# Altium PCB LXDbig.PcbDoc
Units mil, origin at the board's own origin, x right, y up, seen from the top; angles counter-clockwise.
Board outline 10551.18 x 9448.82 mil, 2 copper layers (Top Layer, Bottom Layer); 93 components, 61 nets, 369 pads, 10 vias.
Unrouted connection lines stored in the file: 93.
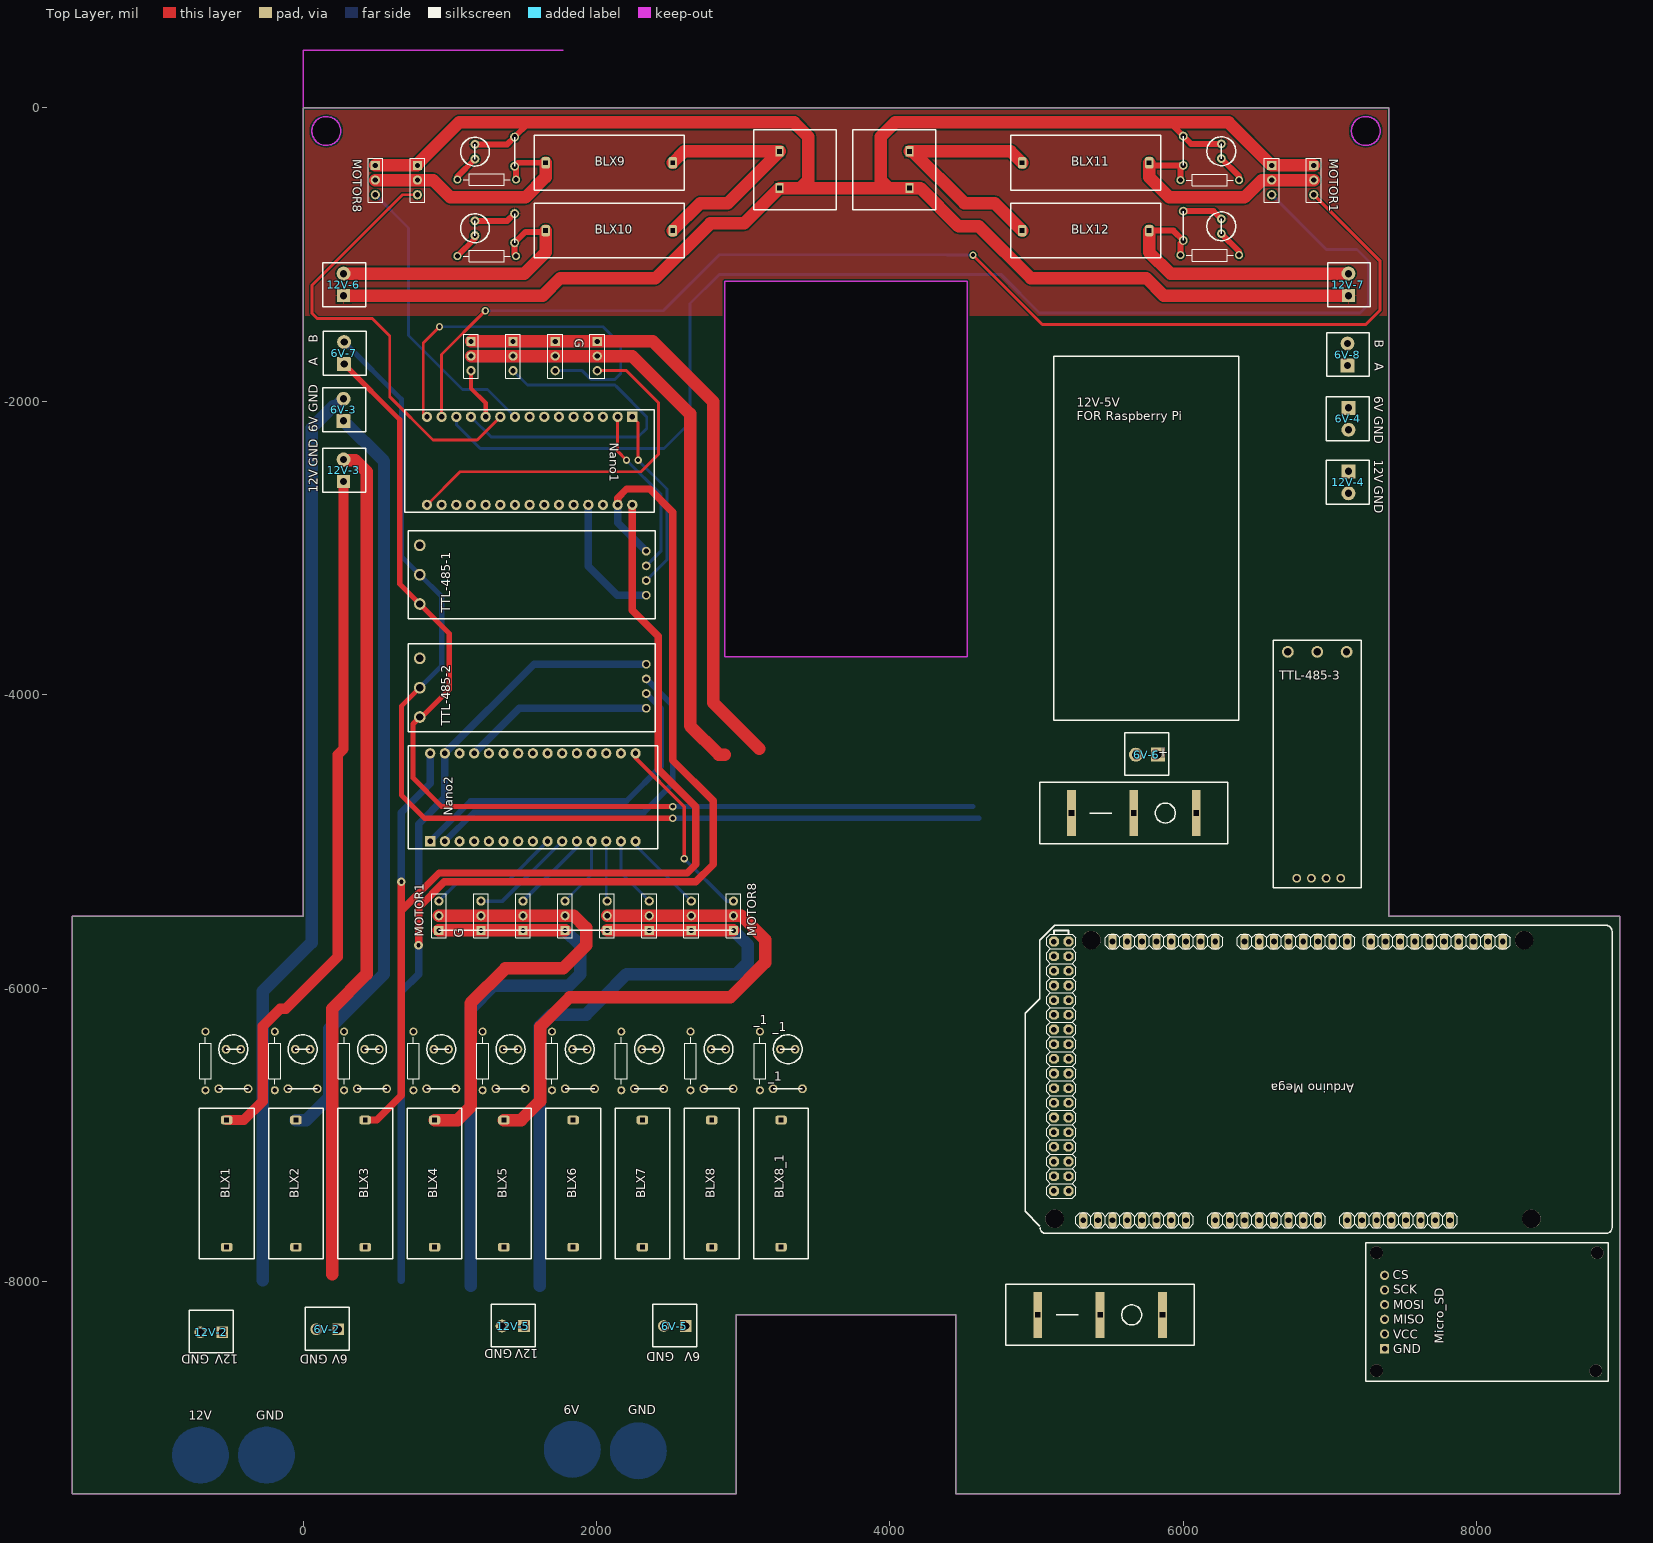
[diagram p0: Top Layer view]
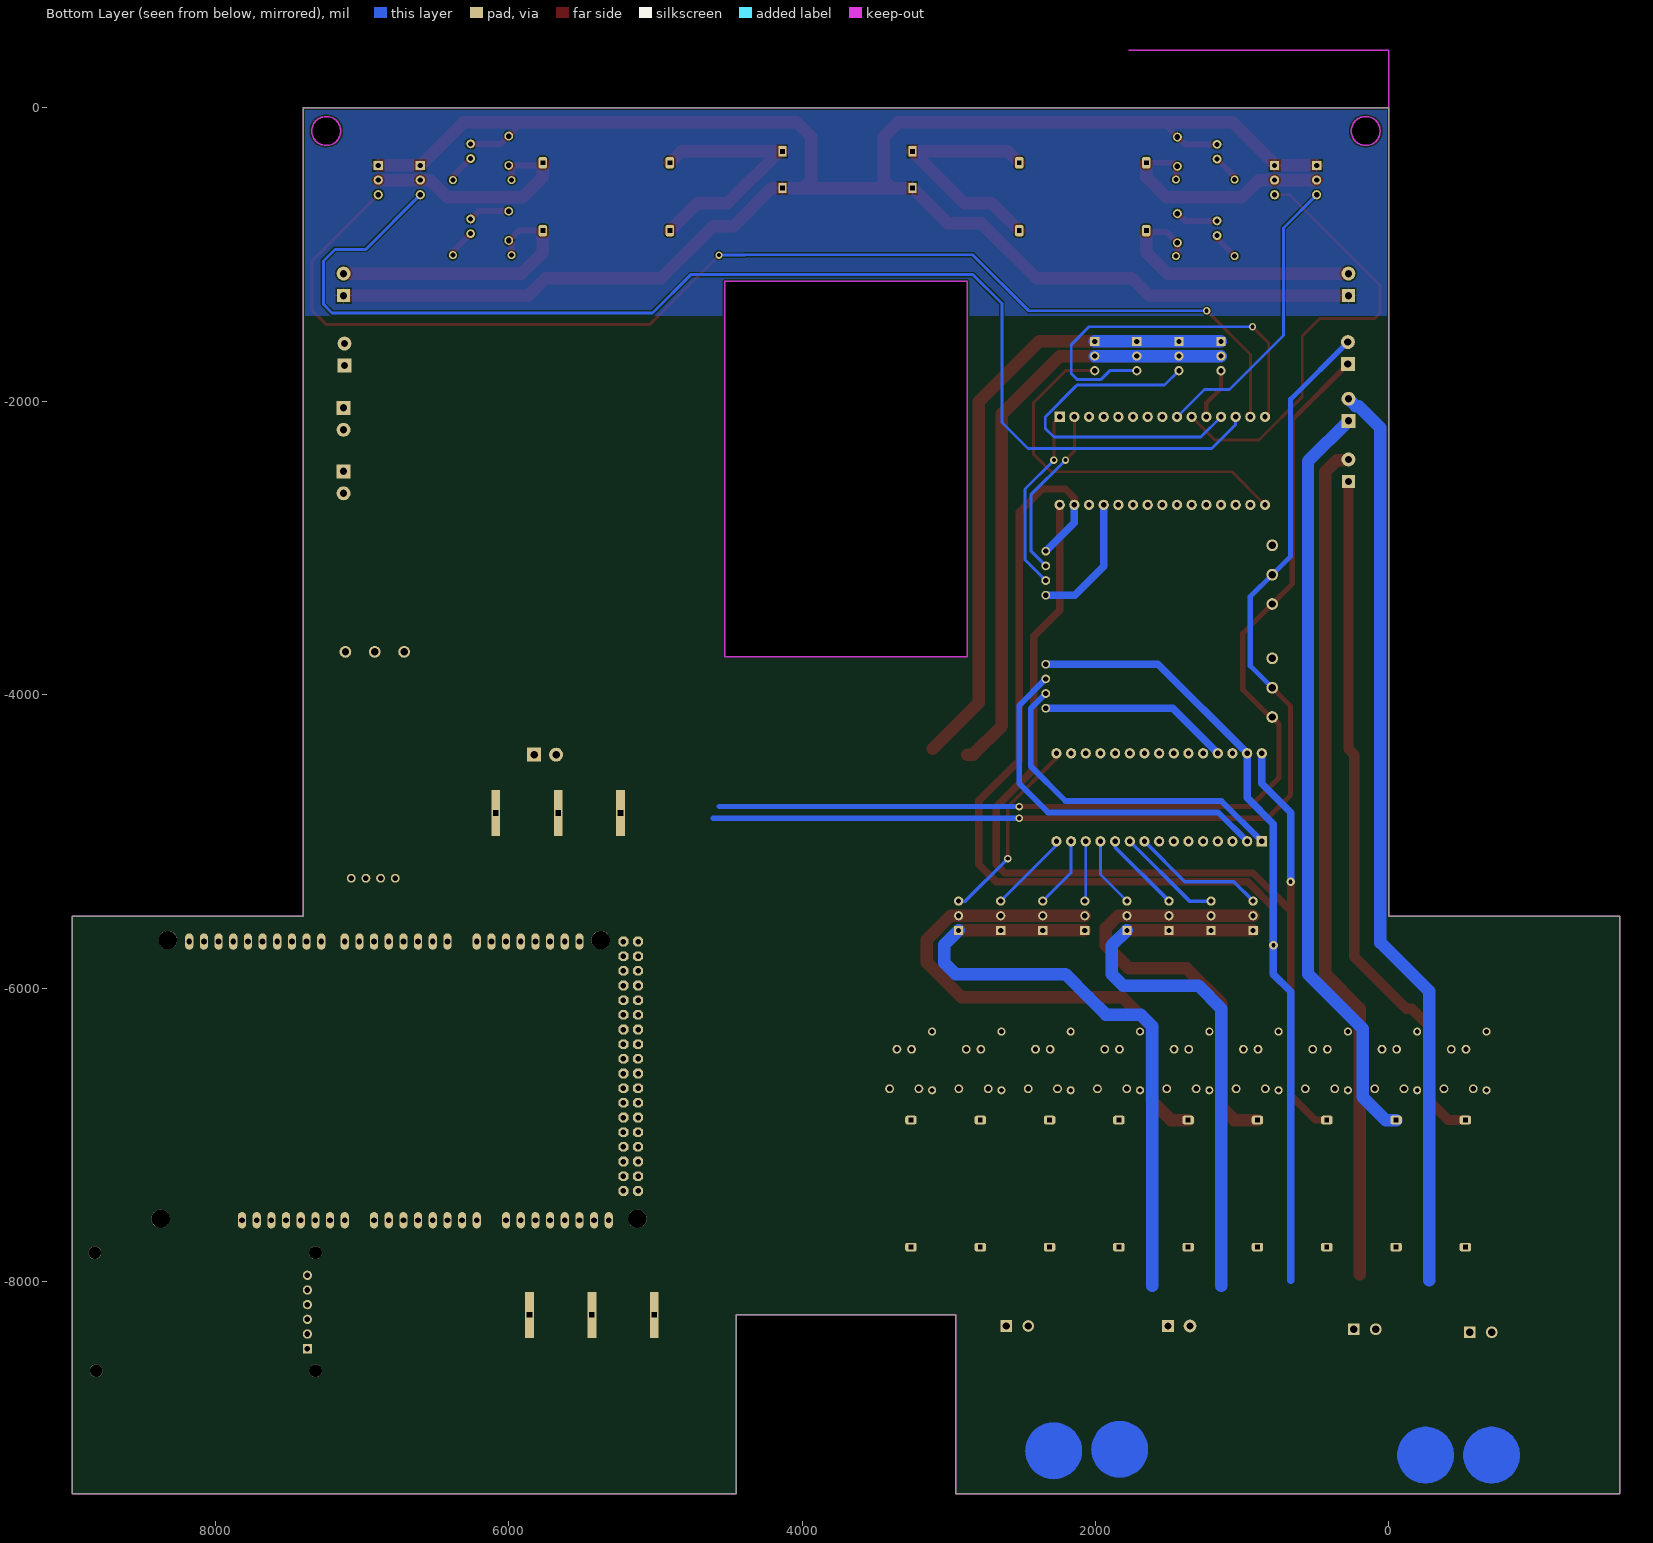
[diagram p1: Bottom Layer view, seen from below]

## Layer stack, top to bottom
Top Solder: solder mask 0.4, Solder Resist, Dk 3.5
Top Layer: signal copper 1.4
Dielectric 1: dielectric 12.6, FR-4, Dk 4.8
Bottom Layer: signal copper 1.4
Bottom Solder: solder mask 0.4, Solder Resist, Dk 3.5

## Board outline
-1574.8,-9448.82 -1574.8,-5511.81 0,-5511.81 0,0 7401.57,0 7401.57,-5511.81 8976.38,-5511.81 8976.38,-9448.82 4448.82,-9448.82 4448.82,-8228.35 2952.76,-8228.35 2952.76,-9448.82
cut-out: 157.48,-255.91 cw(c157.48,-157.48) 59.06,-157.48 cw(c157.48,-157.48) 157.48,-59.06 cw(c157.48,-157.48) 255.91,-157.48 cw(c157.48,-157.48)
cut-out: 7145.67,-157.48 ccw(c7244.09,-157.48) 7244.09,-255.91 ccw(c7244.09,-157.48) 7342.52,-157.48 ccw(c7244.09,-157.48) 7244.09,-59.06 ccw(c7244.09,-157.48)
cut-out: 2874.02,-3740.16 4527.56,-3740.16 4527.56,-1181.1 2874.02,-1181.1

## Design rules (kind name [scope] priority, off if disabled: settings)
Clearance [All] p1: gap=10
HoleSize [All] p1 off: absolutevalues=TRUE maxlimit=150 minlimit=1 maxpercent=80.000 minpercent=20.000
PolygonConnect [All] p1: connectstyle=Relief reliefconductorwidth=10 reliefentries=4 polygonreliefangle="90 Angle" airgapwidth=10
RoutingVias [All] p1: holewidth=28 width=50 viastyle="Through Hole" minholewidth=28 minwidth=50 maxholewidth=28 maxwidth=50
SilkToSilkClearance [All] p1 off: silktosilkclearance=10
SilkToSolderMaskClearance [IsPad] p1 off: minsilkscreentomaskgap=10 clearancetoexposedcopper=TRUE
SolderMaskExpansion [All] p1: expansion=4
Width [All] p1: maxlimit=150 minlimit=20 preferedwidth=20
27 further rules are at their usual default settings.

## Components (designator, comment, footprint, x,y, rotation, side; value= is the part's Value field where it differs from the comment)
6V-2 "Comment" "HEADER 1X2a"#1 239.49,-8326.42 r180 top
6V-3 "Comment" "HEADER 1X2a"#2 275.59,-2133.03 r90 top
6V-4 "Comment" "HEADER 1X2a"#2 7125.98,-2044.45 r270 top
6V-5 "Comment" "HEADER 1X2a"#1 2608.27,-8304.29 r180 top
6V-6 "Comment" "HEADER 1X2a"#2 5826.77,-4409.45 r180 top
6V-7 "Comment" "HEADER 1X2a"#2 279.13,-1746.42 r90 top
6V-8 "Comment" "HEADER 1X2a"#2 7119.68,-1756.26 r90 top
12V-2 "Comment" "HEADER 1X2a"#1 -551.18,-8346.46 r180 top
12V-3 "Comment" "HEADER 1X2a"#3 275.59,-2546.42 r90 top
12V-4 "Comment" "HEADER 1X2a"#2 7125.98,-2477.52 r270 top
12V-5 "Comment" "HEADER 1X2a"#4 1505.91,-8304.29 r180 top
12V-6 "Comment" "HEADER 1X2a"#3 275.59,-1279.53 r90 top
12V-7 "Comment" "HEADER 1X2a"#3 7125.98,-1279.53 r90 top
_1 "Comment" LED_BLUE 3303.78,-6417.2 r0 top
_1 "Comment" C_50V_10u 3203.78,-6687.2 r0 top
_1 "Comment" AXIAL-0.4 3113.78,-6497.2 r90 top
"Arduino Mega" "Comment" arduino_pin 6988.19,-6358.27 r180 top
BLX1 "Comment" BLX-A -521.65,-7766.26 r90 top
BLX2 "Comment" BLX-A -49.21,-7766.26 r90 top
BLX3 "Comment" BLX-A 423.23,-7766.26 r90 top
BLX4 "Comment" BLX-A 895.67,-7766.26 r90 top
BLX5 "Comment" BLX-A 1368.11,-7766.26 r90 top
BLX6 "Comment" BLX-A 1840.55,-7766.26 r90 top
BLX7 "Comment" BLX-A 2312.99,-7766.26 r90 top
BLX8 "Comment" BLX-A 2785.43,-7766.26 r90 top
BLX8_1 "Comment" BLX-A 3257.87,-7766.26 r90 top
BLX9 "Comment" BLX-A 1653.54,-374.02 r0 top
BLX10 "Comment" BLX-A 1653.54,-836.61 r0 top
BLX11 "Comment" BLX-A 4901.57,-374.02 r0 top
BLX12 "Comment" BLX-A 4901.57,-836.61 r0 top
Micro_SD "Comment" Micro_SD 9842.52,-10334.65 r0 top
MOTOR1 "Comment" HDR1X3 6889.76,-392.12 r270 top
MOTOR1 "Comment" HDR1X3 925.2,-5607.44 r90 top
MOTOR8 "Comment" HDR1X3 492.13,-392.12 r270 top
MOTOR8 "Comment" HDR1X3 2933.07,-5607.44 r90 top
Nano1 "Comment" NANO 2244.09,-2106.3 r270 top
Nano2 "Comment" NANO 866.14,-5000 r90 top
TTL-485-1 "Comment" ttl-485#1 2401.57,-3481.46 r180 top
TTL-485-2 "Comment" ttl-485#1 2401.57,-4251.97 r180 top
TTL-485-3 "Comment" ttl-485#2 6614.17,-5314.96 r90 top
? "Comment" LED_BLUE 1171.14,-820.24 r90 top
? "Comment" C_50V_10u 1441.14,-920.24 r90 top
? "Comment" AXIAL-0.4 1251.14,-1010.24 r180 top
? "Comment" LED_BLUE 1171.14,-298.58 r90 top
? "Comment" C_50V_10u 1441.14,-398.58 r90 top
? "Comment" AXIAL-0.4 1251.14,-488.58 r180 top
? "Comment" switch 5433.07,-8228.35 r0 top
? "Comment" "5V REGULATOR" 5118.11,-4173.23 r0 top
? "Comment" 6.35duan 3070.87,-147.64 r270 top
? "Comment" 6.35duan 4311.02,-694.88 r90 top
? "Comment" switch 5662.99,-4807.44 r0 top
? "Comment" AXIAL-0.4 2641.34,-6497.2 r90 top
? "Comment" C_50V_10u 2731.34,-6687.2 r0 top
? "Comment" LED_BLUE 2831.34,-6417.2 r0 top
? "Comment" AXIAL-0.4 2168.9,-6497.2 r90 top
? "Comment" C_50V_10u 2258.9,-6687.2 r0 top
? "Comment" LED_BLUE 2358.9,-6417.2 r0 top
? "Comment" AXIAL-0.4 1696.46,-6497.2 r90 top
? "Comment" C_50V_10u 1786.46,-6687.2 r0 top
? "Comment" LED_BLUE 1886.46,-6417.2 r0 top
? "Comment" AXIAL-0.4 1224.02,-6497.2 r90 top
? "Comment" C_50V_10u 1314.02,-6687.2 r0 top
? "Comment" LED_BLUE 1414.02,-6417.2 r0 top
? "Comment" AXIAL-0.4 751.57,-6497.2 r90 top
? "Comment" C_50V_10u 841.57,-6687.2 r0 top
? "Comment" LED_BLUE 941.57,-6417.2 r0 top
? "Comment" AXIAL-0.4 279.13,-6497.2 r90 top
? "Comment" C_50V_10u 369.13,-6687.2 r0 top
? "Comment" LED_BLUE 469.13,-6417.2 r0 top
? "Comment" AXIAL-0.4 -665.75,-6497.2 r90 top
? "Comment" C_50V_10u -575.75,-6687.2 r0 top
? "Comment" LED_BLUE -475.75,-6417.2 r0 top
? "Comment" AXIAL-0.4 -193.31,-6497.2 r90 top
? "Comment" C_50V_10u -103.31,-6687.2 r0 top
? "Comment" LED_BLUE -3.31,-6417.2 r0 top
? "Comment" HDR1X3 6602.92,-392.12 r270 top
? "Comment" HDR1X3 2005.06,-1591.69 r270 top
? "Comment" HDR1X3 1718.22,-1591.69 r270 top
? "Comment" HDR1X3 1431.38,-1591.69 r270 top
? "Comment" HDR1X3 1144.54,-1591.69 r270 top
? "Comment" HDR1X3 778.97,-392.12 r270 top
? "Comment" HDR1X3 2646.23,-5607.44 r90 top
? "Comment" HDR1X3 2359.39,-5607.44 r90 top
? "Comment" HDR1X3 2072.55,-5607.44 r90 top
? "Comment" HDR1X3 1785.71,-5607.44 r90 top
? "Comment" HDR1X3 1498.88,-5607.44 r90 top
? "Comment" HDR1X3 1212.04,-5607.44 r90 top
? "Comment" AXIAL-0.4 6181.1,-492.13 r0 top
? "Comment" C_50V_10u 5999.8,-191.97 r270 top
? "Comment" LED_BLUE 6259.84,-295.28 r270 top
? "Comment" AXIAL-0.4 6181.1,-1003.94 r0 top
? "Comment" C_50V_10u 5999.8,-703.78 r270 top
? "Comment" LED_BLUE 6259.84,-807.09 r270 top

## Footprints (in the part's own frame and the unit in brackets; to place one, negate y for a bottom-side part, rotate by r counter-clockwise, add the part's x,y. Pads: shape width x height; smd on the part's side, far side on the other; paste and mask are expansions set on the pad)
"5V REGULATOR" [mil]
  silkscreen extent 0,0 1260,2480
6.35duan [mm]
  rect 1.8x1.4 hole 0.8 square: 1(3.775,4.5) 2(10.125,4.5)
  silkscreen extent 0,0 13.9,14.3
arduino_pin [mil]
  round 126 hole 126: 1(-1385,1215) 1(-1335,-685) 1(1615,-685) 1(1865,1215)
  oval 56x112 hole 39: 1(-1190,-675) 1(-830,1225) 1(70,1225) 1(570,-675) 1(970,1225) 1(1470,-675) 2(-1090,-675) 2(-730,1225) 2(170,1225) 2(470,-675) 2(1070,1225) 2(1370,-675) 3(-990,-675) 3(-630,1225) 3(270,1225) 3(370,-675) 3(1170,1225) 3(1270,-675) 4(-890,-675) 4(-530,1225) 4(270,-675) 4(370,1225) 4(1170,-675) 4(1270,1225) 5(-790,-675) 5(-430,1225) 5(170,-675) 5(470,1225) 5(1070,-675) 5(1370,1225) 6(-690,-675) 6(-330,1225) 6(70,-675) 6(570,1225) 6(970,-675) 6(1470,1225) 7(-590,-675) 7(-230,1225) 7(-30,-675) 7(670,1225) 7(870,-675) 7(1570,1225) 8(-490,-675) 8(-130,1225) 8(-130,-675) 8(770,1225) 8(770,-675) 8(1670,1225) 9(-390,-675) 10(-290,-675)
  oct 66x66 hole 38: 1(1770,-675) 2(1870,-675) 3(1770,-575) 4(1870,-575) 5(1770,-475) 6(1870,-475) 7(1770,-375) 8(1870,-375) 9(1770,-275) 10(1870,-275) 11(1770,-175) 12(1870,-175) 13(1770,-75) 14(1870,-75) 15(1770,25) 16(1870,25) 17(1770,125) 18(1870,125) 19(1770,225) 20(1870,225) 21(1770,325) 22(1870,325) 23(1770,425) 24(1870,425) 25(1770,525) 26(1870,525) 27(1770,625) 28(1870,625) 29(1770,725) 30(1870,725) 31(1770,825) 32(1870,825) 33(1770,925) 34(1870,925) 35(1770,1025) 36(1870,1025)
  silkscreen extent -1935,-785 2065,1315
AXIAL-0.4 [mm] "Axial Device, Thru-Hole; 2 Leads; 0.4 in Pin Spacing"
  round 1.4 hole 0.85: 1(-5.08,0) 2(5.08,0)
  silkscreen extent -4.06,-1.02 4.06,1.02
BLX-A [mm]
  rrect50% 1.5x2 hole 0.762 square: 1(0,0) 2(22,0)
  silkscreen extent -2,-4.74 24,4.74
C_50V_10u [mil]
  round 60 hole 38: 1(0,0) 2(200,0)
  silkscreen extent 0,0 200,0
HDR1X3 [mm] "Connector; Header; 3 Position"
  rect 1.6x1.6 hole 0.9: 1(0,0)
  round 1.6 hole 0.9: 2(2.54,0) 3(5.08,0)
  silkscreen extent -1.27,-1.27 6.35,1.27
"HEADER 1X2a"#1 [mil]
  rect 80x80 hole 50: 1(0,0)
  round 80 hole 50: 2(150,0)
  silkscreen extent -75,-150 225,142
"HEADER 1X2a"#2 [mil]
  rect 95x95 hole 50 paste+0: 1(0,0)
  round 95 hole 50: 2(150,0)
  silkscreen extent -75,-150 225,142
"HEADER 1X2a"#3 [mil]
  rect 90x90 hole 50: 1(0,0)
  round 95 hole 50: 2(150,0)
  silkscreen extent -75,-150 225,142
"HEADER 1X2a"#4 [mil]
  rect 80x80 hole 50: 1(0,0)
  round 86.61 hole 50: 2(150,0)
  silkscreen extent -75,-150 225,142
LED_BLUE [mil]
  round 60 hole 35: 1(-50,0) 2(50,0)
  silkscreen extent -98,-98 98,98
Micro_SD [mm]
  rect 1.6x1.6 hole 0.965: 1(-62.738,47.65)
  round 1.6 hole 0.965: 2(-62.738,50.19) 3(-62.738,52.73) 4(-62.738,55.27) 5(-62.738,57.81) 6(-62.738,60.35)
  round 2.2 hole 2.2: 6(-64.135,43.815) 6(-64.135,64.262) 6(-26.162,43.815) 6(-25.908,64.262)
  silkscreen extent -66,42 -24,66
NANO [mil]
  rect 70x70 hole 36: 1(0,0)
  round 70 hole 36: 2(0,-100) 3(0,-200) 4(0,-300) 5(0,-400) 6(0,-500) 7(0,-600) 8(0,-700) 9(0,-800) 10(0,-900) 11(0,-1000) 12(0,-1100) 13(0,-1200) 14(0,-1300) 15(0,-1400) 16(600,-1400) 17(600,-1300) 18(600,-1200) 19(600,-1100) 20(600,-1000) 21(600,-900) 22(600,-800) 23(600,-700) 24(600,-600) 25(600,-500) 26(600,-400) 27(600,-300) 28(600,-200) 29(600,-100) 30(600,0)
  silkscreen extent -50,-1550 650,150
switch [mm]
  rect 1.524x8 hole 0.9 square: 1(-10.8,0) 2(0,0) 3(10.8,0)
  silkscreen extent -16.3,-5.3 16.3,5.3
ttl-485#1 [mil]
  round 80 hole 50: 1(1606.3,-99.21) 2(1606.3,-299.21) 3(1606.3,-499.21)
  round 60 hole 35: 4(62.99,-159.45) 5(62.99,-259.45) 6(62.99,-359.45) 7(62.99,-459.45)
  silkscreen extent 0,-599 1685,0
ttl-485#2 [mil]
  round 80 hole 50: 1(1606.3,-99.21) 2(1606.3,-299.21) 3(1606.3,-499.21)
  round 60 hole 38: 4(62.99,-159.45) 5(62.99,-259.45) 6(62.99,-359.45) 7(62.99,-459.45)
  silkscreen extent 0,-599 1685,0

## Via types
v1: diameter 50, hole 28, Top Layer to Bottom Layer, 8 vias
v2: diameter 60, hole 28, Top Layer to Bottom Layer, 2 vias

## Nets (pads, with @x,y where several pads share a name; then routed paths per layer and width w, separated by ;. In a path a pad name is that pad's centre, name@x,y a point inside that pad or via, vN(x,y) a via of type N, cw(c..) or ccw(c..) an arc to the next point about the centre after c; other vN are vias at no path point)
3V3: 
6IN: 
6ING: 
7.5VL: ?.1@3248.03,-296.26 BLX9.2 BLX10.2 | length 1712.7
  Top Layer w85: BLX10.2 2705.71,-650.59 2893.7,-650.59 3248.03,-296.26 2597.44,-296.26 BLX9.2
7.5VLO: ?.1@1441.14,-398.58 ?.1@1451.14,-488.58 ?.2@778.97,-492.13 BLX9.1 MOTOR8.2@492.13,-492.13 | length 1682.6
  Top Layer w40: ?.1@1451.14,-488.58 1451.14,-408.58 1441.14,-398.58 1465.71,-374.02 BLX9.1
  Top Layer w85: MOTOR8.2@492.13,-492.13 778.97,-492.13 885.83,-492.13 1003.94,-610.24 1515.75,-610.24 1653.54,-472.44 BLX9.1
7.5VLO2: 12V-6.2 ?.1@1441.14,-920.24 ?.1@1451.14,-1010.24 BLX10.1 | length 1926.9
  Top Layer w40: ?.1@1451.14,-1010.24 1441.14,-1000.24 1441.14,-920.24 1514.92,-846.46 1643.7,-846.46 BLX10.1
  Top Layer w85: 12V-6.2 1508.27,-1129.53 1653.54,-984.25 BLX10.1
7.5VR: ?.2@4133.86,-296.26 BLX11.1 BLX12.1 | length 1770.8
  Top Layer w85: ?.2@4133.86,-296.26 ?.2@4154.53,-296.26 ; BLX12.1 4714.57,-649.61 4507.87,-649.61 ?.2@4154.53,-296.26 ; BLX11.1 4823.82,-296.26 ?.2@4154.53,-296.26
7.5VRO: ?.1@5981.1,-492.13 ?.2@5999.8,-391.97 ?.2@6602.92,-492.13 BLX11.2 MOTOR1.2@6889.76,-492.13 | length 1673.9
  Top Layer w40: BLX11.2 5785.67,-391.97 5999.8,-391.97 5981.1,-410.67 ?.1@5981.1,-492.13
  Top Layer w85: BLX11.2 5767.72,-472.44 5905.51,-610.24 6417.32,-610.24 6535.43,-492.13 6602.92,-492.13 MOTOR1.2@6889.76,-492.13
7.5VRO2: 12V-7.2 ?.1@5981.1,-1003.94 ?.2@5999.8,-903.78 BLX12.2 | length 1933.9
  Top Layer w40: BLX12.2 5932.64,-836.61 5999.8,-903.78 5981.1,-922.48 ?.1@5981.1,-1003.94
  Top Layer w85: BLX12.2 5767.72,-984.25 5912.99,-1129.53 12V-7.2
12IN: 
12ING: 
50: "Arduino Mega.31" Micro_SD.3
51: "Arduino Mega.32" Micro_SD.4
52: "Arduino Mega.33" Micro_SD.5
53: "Arduino Mega.34" Micro_SD.6@7372.52,-7958.66
GND: 6V-2.2 6V-3.2 6V-4.2 6V-5.2 6V-6.2 12V-2.2 12V-3.2 12V-4.2 12V-5.2 12V-6.1 12V-7.1 "Arduino Mega.6"@7318.19,-7583.27 "Arduino Mega.7"@7218.19,-7583.27 ?.1@778.97,-392.13 ?.1@1144.54,-1591.69 ?.1@1212.04,-5607.44 ?.1@1431.38,-1591.69 ?.1@1498.88,-5607.44 ?.1@1718.22,-1591.69 ?.1@1785.72,-5607.44 ?.1@2005.06,-1591.69 ?.1@2072.55,-5607.44 ?.1@2359.39,-5607.44 ?.1@2646.23,-5607.44 ?.1@4133.86,-546.26 ?.1@5999.8,-191.97 ?.1@5999.8,-703.78 ?.1@6259.84,-245.28 ?.1@6259.84,-757.09 ?.1@6602.92,-392.13 ?.2@46.69,-6417.21 ?.2@96.69,-6687.21 ?.2@519.13,-6417.21 ?.2@569.13,-6687.21 ?.2@991.58,-6417.21 ?.2@1041.58,-6687.21 ?.2@1171.14,-248.58 ?.2@1171.14,-770.24 ?.2@1441.14,-198.58 ?.2@1441.14,-720.24 ?.2@1464.02,-6417.21 ?.2@1514.02,-6687.21 ?.2@1936.46,-6417.21 ?.2@1986.46,-6687.21 ?.2@2408.9,-6417.21 ?.2@2458.9,-6687.21 ?.2@2881.34,-6417.21 ?.2@2931.34,-6687.21 ?.2@3248.03,-546.26 ?.2@-375.75,-6687.21 ?.2@-425.75,-6417.21 Micro_SD.1 MOTOR1.1 MOTOR8.1 Nano1.29 Nano2.29 TTL-485-1.7 TTL-485-2.7 TTL-485-3.7 | length 52617.3
  Top Layer w40: ?.2@1171.14,-770.24 1391.14,-770.24 ?.2@1441.14,-720.24 ; ?.2@1171.14,-248.58 1391.14,-248.58 1441.14,-198.58 1535.43,-104.29 ; 5905.51,-98.43 5906.26,-98.43 5999.8,-191.97 6053.11,-245.28 ?.1@6259.84,-245.28 ; ?.1@5999.8,-703.78 6206.53,-703.78 ?.1@6259.84,-757.09
  Top Layer w50: v2(787.4,-5708.66) 787.4,-5451.2 963.01,-5275.59 2677.17,-5275.59 2795.28,-5157.48 2795.28,-4724.41 2519.69,-4448.82 2519.69,-2755.91 2362.2,-2598.43 2204.72,-2598.43 2144.09,-2659.06 Nano1.29
  Top Layer w85: 196.85,-7952.76 196.85,-6141.73 433.07,-5905.51 433.07,-2480.32 354.33,-2401.57 280.75,-2401.57 12V-3.2 ; 12V-6.1 1633.86,-1279.53 1751.97,-1161.42 2401.57,-1161.42 2775.59,-787.4 3006.89,-787.4 3248.03,-546.26 3390.75,-546.26 ; MOTOR8.1@492.13,-392.13 778.97,-392.13 778.97,-382.45 1062.99,-98.43 3346.46,-98.43 3444.88,-196.85 3444.88,-492.13 3390.75,-546.26 ; MOTOR1.1@925.2,-5607.44 1212.04,-5607.44 1498.88,-5607.44 ?.1@1785.72,-5607.44 ; ?.1@1144.54,-1591.69 1431.38,-1591.69 1718.22,-1591.69 2005.06,-1591.69 2384.68,-1591.69 2795.28,-2002.28 2795.28,-4055.12 3110.24,-4370.08 ; ?.1@2072.55,-5607.44 2359.39,-5607.44 2646.23,-5607.44 MOTOR8.1@2933.07,-5607.44 ; 5905.51,-98.43 4035.43,-98.43 3937.01,-196.85 3937.01,-492.13 3991.14,-546.26 ; 5906.26,-98.43 6309.22,-98.43 6602.92,-392.13 MOTOR1.1@6889.76,-392.13 ; 12V-7.1 5866.14,-1279.53 5748.03,-1161.42 4960.63,-1161.42 4606.3,-807.09 4468.5,-807.09 4207.68,-546.26 4133.86,-546.26 3991.14,-546.26 ; 3390.75,-546.26 3991.14,-546.26
  Bottom Layer w50: 669.29,-7992.13 669.29,-6023.62 787.4,-5905.51 v2(787.4,-5708.66) 787.4,-4881.89 966.14,-4703.15 Nano2.29 1573.62,-3792.52 TTL-485-2.7 ; Nano1.29 2144.09,-2827.52 TTL-485-1.7
  Bottom Layer w85: -275.59,-7992.13 -275.59,-6023.62 57.5,-5690.53 57.5,-2181.87 206.34,-2033.03 225.59,-2033.03 6V-3.2 ; 1141.73,-8031.5 1141.73,-6141.73 1299.21,-5984.25 1811.02,-5984.25 1889.76,-5905.51 1889.76,-5711.49 ?.1@1785.72,-5607.44 ; ?.1@1144.54,-1591.69 1431.38,-1591.69 1718.22,-1591.69 ?.1@2005.06,-1591.69 ; 1614.17,-8031.5 1614.17,-6259.84 1692.91,-6181.1 1929.13,-6181.1 2047.24,-6062.99 2204.72,-5905.51 2952.76,-5905.51 3031.5,-5826.77 3031.5,-5705.86 MOTOR8.1@2933.07,-5607.44
LED1: ?.1@-525.75,-6417.21 ?.2@-665.75,-6297.21
LED2: ?.1@-53.31,-6417.21 ?.2@-193.31,-6297.21
LED3: ?.1@419.13,-6417.21 ?.2@279.13,-6297.21
LED4: ?.1@891.58,-6417.21 ?.2@751.58,-6297.21
LED5: ?.1@1364.02,-6417.21 ?.2@1224.02,-6297.21
LED6: ?.1@1836.46,-6417.21 ?.2@1696.46,-6297.21
LED7: ?.1@2308.9,-6417.21 ?.2@2168.9,-6297.21
LED8: ?.1@2781.34,-6417.21 ?.2@2641.34,-6297.21
LED9: ?.1@1171.14,-348.58 ?.2@1051.14,-488.58 | length 189.7
  Top Layer w40: ?.2@1051.14,-488.58 1051.14,-468.58 ?.1@1171.14,-348.58
LED10: ?.1@1171.14,-870.24 ?.2@1051.14,-1010.24 | length 189.7
  Top Layer w40: ?.2@1051.14,-1010.24 1171.14,-890.24 ?.1@1171.14,-870.24
LED11: ?.2@6259.84,-345.28 ?.2@6381.1,-492.13 | length 197.1
  Top Layer w40: ?.2@6259.84,-345.28 6381.1,-466.54 ?.2@6381.1,-492.13
LED12: ?.2@6259.84,-857.09 ?.2@6381.1,-1003.94 | length 197.1
  Top Layer w40: ?.2@6259.84,-857.09 6381.1,-978.35 ?.2@6381.1,-1003.94
LED+: 
M1: MOTOR1.3@925.2,-5407.44 Nano2.9 | length 909.7
  Bottom Layer w25: MOTOR1.3@925.2,-5407.44 1057.05,-5275.59 1390.55,-5275.59 Nano2.9
M1U: MOTOR8.3@492.13,-592.13 Nano1.9 | length 2008.6
  Bottom Layer w20: MOTOR8.3@492.13,-592.13 718.97,-818.97 718.97,-1552.05 1085.97,-1919.05 1256.84,-1919.05 Nano1.9
M2: ?.3@1212.04,-5407.44 Nano2.10 | length 722.9
  Bottom Layer w25: ?.3@1212.04,-5407.44 1358.7,-5407.44 Nano2.10
M2U: ?.3@778.97,-592.13 Nano1.10 | length 3114.1
  Top Layer w20: ?.3@778.97,-592.13 677.89,-592.13 59.06,-1210.96 59.06,-1397.64 98.43,-1437.01 472.44,-1437.01 590.55,-1555.12 590.55,-1968.5 885.83,-2263.78 1186.61,-2263.78 Nano1.10
M3: ?.3@1498.88,-5407.44 Nano2.11 | length 559.6
  Bottom Layer w25: ?.3@1498.88,-5407.44 1866.14,-5040.17 Nano2.11
M3U: ?.3@1144.54,-1791.69 Nano1.11 | length 355.8
  Top Layer w30: ?.3@1144.54,-1791.69 1144.54,-1912.26 1244.09,-2011.81 Nano1.11
M4: ?.3@1785.72,-5407.44 Nano2.12 | length 482.2
  Bottom Layer w20: ?.3@1785.72,-5407.44 1966.14,-5227.01 Nano2.12
M4U: ?.3@1431.38,-1791.69 Nano1.12 | length 2400.2
  Bottom Layer w20: Nano1.12 1281.89,-2244.09 2283.46,-2244.09 2342.52,-2185.04 2342.52,-2106.3 2137.76,-1901.54 2125.98,-1889.76 1529.46,-1889.76 ?.3@1431.38,-1791.69
M5: ?.3@2072.55,-5407.44 Nano2.13 | length 410.1
  Bottom Layer w20: Nano2.13 2066.14,-5401.03 ?.3@2072.55,-5407.44
M5U: ?.3@6602.92,-592.13 Nano1.13 | length 8582.5
  Bottom Layer w20: Nano1.13 1044.09,-2159.17 1207.76,-2322.83 2460.63,-2322.83 2637.8,-2145.67 2637.8,-1333.9 2834.65,-1137.05 4759.09,-1137.05 5019.69,-1397.64 7204.72,-1397.64 7263.78,-1338.58 7263.78,-1043.31 7185.04,-964.57 6975.37,-964.57 ?.3@6602.92,-592.13
M6: ?.3@2359.39,-5407.44 Nano2.14 | length 487.5
  Bottom Layer w20: Nano2.14 2166.14,-5214.19 ?.3@2359.39,-5407.44
M6U: MOTOR1.3@6889.76,-592.13 Nano1.14 | length 8316.4
  Top Layer w20: Nano1.14 944.09,-1680.92 v1(1241.97,-1383.05) ; v1(4566.93,-1003.94) 5039.37,-1476.38 7244.09,-1476.38 7342.52,-1377.95 7342.52,-1044.88 MOTOR1.3@6889.76,-592.13
  Bottom Layer w20: v1(1241.97,-1383.05) 2455.54,-1383.05 2837.54,-1001.05 4389.76,-1001.05 4392.65,-1003.94 v1(4566.93,-1003.94)
M7: ?.3@2646.23,-5407.44 Nano2.15 | length 564.9
  Bottom Layer w20: Nano2.15 2266.14,-5027.35 ?.3@2646.23,-5407.44
M7U: ?.3@1718.22,-1791.69 Nano1.15 | length 2641.7
  Top Layer w20: Nano1.15 818.97,-2081.18 818.97,-1602.29 v1(929.21,-1492.05)
  Bottom Layer w20: v1(929.21,-1492.05) 2043.23,-1492.05 2165.35,-1614.17 2165.35,-1811.02 2125.98,-1850.39 1961.17,-1850.39 1902.47,-1791.69 ?.3@1718.22,-1791.69
M8: MOTOR8.3@2933.07,-5407.44 Nano2.16 | length 1310.2
  Top Layer w25: Nano2.16 2266.14,-4431.5 2598.43,-4763.78 v1(2598.43,-5118.11)
  Bottom Layer w25: v1(2598.43,-5118.11) 2887.75,-5407.44 MOTOR8.3@2933.07,-5407.44
M8U: ?.3@2005.06,-1791.69 Nano1.16 | length 2579.8
  Top Layer w20: Nano1.16 1070.08,-2480.32 2303.15,-2480.32 2421.26,-2362.2 2421.26,-2007.87 2205.08,-1791.69 ?.3@2005.06,-1791.69
NewNet1: 6V-7.1 6V-8.1 TTL-485-1.1 TTL-485-2.1 TTL-485-3.1 | length 7127.7
  Top Layer w35: 6V-7.1 658.7,-2125.98 658.7,-3245.67 TTL-485-1.1 995.71,-3582.68 995.71,-3964.92 807.87,-4152.76 TTL-485-2.1 748.03,-4200 748.03,-4566.93 944.88,-4763.78 v1(2519.69,-4763.78)
  Bottom Layer w35: v1(2519.69,-4763.78) 4566.93,-4763.78
NewNet2: 6V-7.2 6V-8.2 TTL-485-1.2 TTL-485-2.2 TTL-485-3.2 | length 7480.8
  Top Layer w35: TTL-485-2.2 669.29,-4078.74 669.29,-4685.04 826.77,-4842.52 v1(2519.69,-4842.52)
  Bottom Layer w35: 6V-7.2 669.29,-1986.57 669.29,-3056.26 TTL-485-1.2 944.88,-3331.85 944.88,-3803.15 TTL-485-2.2 ; v1(2519.69,-4842.52) 4606.3,-4842.52
NewNet3: 
RX: Nano2.2 TTL-485-2.6 | length 2505.4
  Bottom Layer w40: Nano2.2 1162.99,-4803.15 2322.83,-4803.15 2519.69,-4606.3 2519.69,-4073.62 TTL-485-2.6
RX1: "Arduino Mega.3"@5718.19,-5683.27 TTL-485-3.6
RXU: Nano1.2 TTL-485-1.6 | length 1181.1
  Top Layer w20: Nano1.2 2144.09,-2340.94 v1(2204.72,-2401.57)
  Bottom Layer w20: v1(2204.72,-2401.57) 2440.94,-2637.8 2440.94,-3019.65 TTL-485-1.6
TX: Nano2.1 TTL-485-2.5 | length 2325.1
  Bottom Layer w40: Nano2.1 1141.73,-4724.41 2204.72,-4724.41 2440.94,-4488.19 2440.94,-4094.49 2338.98,-3992.52 TTL-485-2.5
TX1: "Arduino Mega.4"@5818.19,-5683.27 TTL-485-3.5
TXU: Nano1.1 TTL-485-1.5 | length 1272.3
  Top Layer w20: Nano1.1 2283.46,-2145.67 v1(2283.46,-2401.57)
  Bottom Layer w20: v1(2283.46,-2401.57) 2480.32,-2598.43 2480.32,-3080.28 TTL-485-1.5
V5: Nano2.27 TTL-485-2.4 | length 1299.8
  Bottom Layer w50: Nano2.27 1473.62,-4092.52 TTL-485-2.4
V5M: "Arduino Mega.5"@7418.19,-7583.27 Micro_SD.2 TTL-485-3.4
V5U: Nano1.27 TTL-485-1.4 | length 894.9
  Bottom Layer w50: Nano1.27 1944.09,-3125.19 2140.9,-3322.01 TTL-485-1.4
V6: 6V-2.1 6V-3.1 6V-4.1 6V-5.1 ?.1@279.13,-6697.21 ?.1@369.13,-6687.21 ?.1@751.58,-6697.21 ?.1@841.58,-6687.21 ?.1@2168.9,-6697.21 ?.1@2258.9,-6687.21 ?.1@2641.34,-6697.21 ?.1@2731.34,-6687.21 ?.2@1144.54,-1691.69 ?.2@1212.04,-5507.44 ?.2@1431.38,-1691.69 ?.2@1498.88,-5507.44 ?.2@1718.22,-1691.69 ?.2@1785.72,-5507.44 ?.2@2005.06,-1691.69 ?.2@2072.55,-5507.44 ?.2@2359.39,-5507.44 ?.2@2646.23,-5507.44 BLX2.1 BLX2.2 BLX4.1 BLX4.2 BLX5.1 BLX5.2 BLX7.1 BLX7.2 BLX8.1 BLX8.2 MOTOR1.2@925.2,-5507.44 MOTOR8.2@2933.07,-5507.44 | length 17056.4
  Top Layer w85: BLX4.2 1052.64,-6900.12 1141.73,-6811.02 1141.73,-6102.36 1377.95,-5866.14 1771.65,-5866.14 1929.13,-5708.66 1929.13,-5590.55 1846.02,-5507.44 1785.72,-5507.44 1498.88,-5507.44 1212.04,-5507.44 MOTOR1.2@925.2,-5507.44 ; ?.2@1144.54,-1691.69 1431.38,-1691.69 1718.22,-1691.69 2005.06,-1691.69 2242.87,-1691.69 2637.8,-2086.61 2637.8,-4212.6 2834.65,-4409.45 2874.02,-4409.45 ; BLX5.2 1485.71,-6900.12 1614.17,-6771.65 1616.4,-6771.65 1616.4,-6264.04 1817.45,-6062.99 2913.39,-6062.99 3149.61,-5826.77 3149.61,-5669.29 2987.75,-5507.44 2933.07,-5507.44 2646.23,-5507.44 2359.39,-5507.44 ?.2@2072.55,-5507.44
  Bottom Layer w85: BLX2.2 22.17,-6900.12 179.19,-6743.09 179.19,-6277.5 551.18,-5905.51 551.18,-2408.62 6V-3.1 ; ?.2@1144.54,-1691.69 1431.38,-1691.69 1718.22,-1691.69 ?.2@2005.06,-1691.69
V12: 12V-2.1 12V-3.1 12V-4.1 12V-5.1 "Arduino Mega.8"@7118.19,-7583.27 ?.1@1224.02,-6697.21 ?.1@1314.02,-6687.21 ?.1@1696.46,-6697.21 ?.1@1786.46,-6687.21 ?.1@5237.79,-4807.44 ?.1@-103.31,-6687.21 ?.1@-193.31,-6697.21 ?.1@-575.75,-6687.21 ?.1@-665.75,-6697.21 BLX1.1 BLX1.2 BLX3.1 BLX3.2 BLX6.1 BLX6.2 Nano1.30 Nano2.30 | length 12274.2
  Top Layer w50: BLX3.2 501.46,-6900.12 669.29,-6732.28 669.29,-5472.44 ; v2(669.29,-5275.59) 669.29,-5472.44 ; Nano1.30 2244.09,-3425.19 2421.26,-3602.36 2421.26,-4507.87 2677.17,-4763.78 2677.17,-5157.48 2619.06,-5215.59 926.14,-5215.59 669.29,-5472.44
  Top Layer w70: BLX1.2 -404.05,-6900.12 -275.59,-6771.65 -275.59,-6259.84 -157.48,-6141.73 -118.11,-6141.73 236.22,-5787.4 236.22,-4409.45 275.59,-4370.08 12V-3.1
  Bottom Layer w50: v2(669.29,-5275.59) 669.29,-4803.15 866.14,-4606.3 Nano2.30
V12H: 6V-6.1 ?.2@5662.99,-4807.44
V12M: 
pads on no net: "Arduino Mega.1" "Arduino Mega.2" "Arduino Mega.3"@5218.19,-5783.27 "Arduino Mega.3"@5818.19,-7583.27 "Arduino Mega.3"@6618.19,-5683.27 "Arduino Mega.3"@6718.19,-7583.27 "Arduino Mega.3"@7618.19,-7583.27 "Arduino Mega.3"@7978.19,-5683.27 "Arduino Mega.4"@5118.19,-5783.27 "Arduino Mega.4"@5718.19,-7583.27 "Arduino Mega.4"@6618.19,-7583.27 "Arduino Mega.4"@6718.19,-5683.27 "Arduino Mega.4"@7518.19,-7583.27 "Arduino Mega.4"@7878.19,-5683.27 "Arduino Mega.5"@5218.19,-5883.27 "Arduino Mega.5"@5618.19,-7583.27 "Arduino Mega.5"@5918.19,-5683.27 "Arduino Mega.5"@6518.19,-7583.27 "Arduino Mega.5"@6818.19,-5683.27 "Arduino Mega.5"@7778.19,-5683.27 "Arduino Mega.6"@5118.19,-5883.27 "Arduino Mega.6"@5518.19,-7583.27 "Arduino Mega.6"@6018.19,-5683.27 "Arduino Mega.6"@6418.19,-7583.27 "Arduino Mega.6"@6918.19,-5683.27 "Arduino Mega.6"@7678.19,-5683.27 "Arduino Mega.7"@5218.19,-5983.27 "Arduino Mega.7"@5418.19,-7583.27 "Arduino Mega.7"@6118.19,-5683.27 "Arduino Mega.7"@6318.19,-7583.27 "Arduino Mega.7"@7018.19,-5683.27 "Arduino Mega.7"@7578.19,-5683.27 "Arduino Mega.8"@5118.19,-5983.27 "Arduino Mega.8"@5318.19,-7583.27 "Arduino Mega.8"@6218.19,-5683.27 "Arduino Mega.8"@6218.19,-7583.27 "Arduino Mega.8"@7118.19,-5683.27 "Arduino Mega.8"@7478.19,-5683.27 "Arduino Mega.9" "Arduino Mega.10" "Arduino Mega.11" "Arduino Mega.12" "Arduino Mega.13" "Arduino Mega.14" "Arduino Mega.15" "Arduino Mega.16" "Arduino Mega.17" "Arduino Mega.18" "Arduino Mega.19" "Arduino Mega.20" "Arduino Mega.21" "Arduino Mega.22" "Arduino Mega.23" "Arduino Mega.24" "Arduino Mega.25" "Arduino Mega.26" "Arduino Mega.27" "Arduino Mega.28" "Arduino Mega.29" "Arduino Mega.30" "Arduino Mega.35" "Arduino Mega.36" ?.1@5007.87,-8228.35 ?.2@5433.07,-8228.35 ?.3@5858.27,-8228.35 ?.3@6088.19,-4807.44 _1.1 _1.2 BLX8_1.1 BLX8_1.2 Micro_SD.6@7317.52,-7804.65 Micro_SD.6@7317.52,-8609.65 Micro_SD.6@8812.52,-8609.65 Micro_SD.6@8822.52,-7804.65 Nano1.3 Nano1.4 Nano1.5 Nano1.6 Nano1.7 Nano1.8 Nano1.17 Nano1.18 Nano1.19 Nano1.20 Nano1.21 Nano1.22 Nano1.23 Nano1.24 Nano1.25 Nano1.26 Nano1.28 Nano2.3 Nano2.4 Nano2.5 Nano2.6 Nano2.7 Nano2.8 Nano2.17 Nano2.18 Nano2.19 Nano2.20 Nano2.21 Nano2.22 Nano2.23 Nano2.24 Nano2.25 Nano2.26 Nano2.28 TTL-485-1.3 TTL-485-2.3 TTL-485-3.3

## Polygon pours and split planes (outlines as drawn)
GND on Top Layer "Top Layer-UP" (solid, pour order 0): 0,0 0,-1377.95 0,-1417.32 2874.02,-1417.32 2874.02,-1181.1 4527.56,-1181.1 4527.56,-1417.32 7401.57,-1417.32 7401.57,0 0,0
GND on Bottom Layer "Top Layer-UP" (solid, pour order 2): 0,-1417.32 0,0 7401.57,0 7401.57,-1417.32 4527.56,-1417.32 4527.56,-1181.1 2874.02,-1181.1 2874.02,-1417.32 0,-1417.32

## Keep-outs
Keep-Out Layer:
  circle w10: c157.48,-157.48 r98.43
  circle w10: c7244.09,-157.48 r98.43
  lines w10: 1771.65,393.7 0,393.7 0,0 ; 0,0 0,-5511.81 -1574.8,-5511.81 -1574.8,-9448.82 2952.76,-9448.82 2952.76,-8228.35 4448.82,-8228.35 4448.82,-9448.82 8976.38,-9448.82 8976.38,-5511.81 7401.57,-5511.81 7401.57,0 0,0 ; 2874.02,-3740.16 4527.56,-3740.16 4527.56,-1181.1 2874.02,-1181.1 2874.02,-3740.16

## Other copper
Bottom Layer:
  region: -892.75,-9184.29 ccw(c-700.39,-9184.29) -700.39,-9376.65 ccw(c-700.39,-9184.29) -508.04,-9184.29 ccw(c-700.39,-9184.29) -700.39,-8991.94 ccw(c-700.39,-9184.29)
  region: -442.75,-9184.29 ccw(c-250.39,-9184.29) -250.39,-9376.65 ccw(c-250.39,-9184.29) -58.04,-9184.29 ccw(c-250.39,-9184.29) -250.39,-8991.94 ccw(c-250.39,-9184.29)
  region: 1642.69,-9144.92 ccw(c1835.04,-9144.92) 1835.04,-9337.28 ccw(c1835.04,-9144.92) 2027.39,-9144.92 ccw(c1835.04,-9144.92) 1835.04,-8952.57 ccw(c1835.04,-9144.92)
  region: 2092.69,-9154.92 ccw(c2285.04,-9154.92) 2285.04,-9347.28 ccw(c2285.04,-9154.92) 2477.39,-9154.92 ccw(c2285.04,-9154.92) 2285.04,-8962.57 ccw(c2285.04,-9154.92)

## Silkscreen, mask and mechanical layers (free items; w line width, h text height)
Top Overlay:
  lines w10: 925.2,-5607.44 2933.07,-5607.44
  text "G" at 1850.39,-1574.8 h60 r270
  text "B" at 7306.69,-1579.09 h60 r270
  text "B" at 98.43,-1601.54 h60 r90
  text "A" at 7306.69,-1736.57 h60 r270
  text "A" at 98.43,-1759.02 h60 r90
  text "6V" at 7303.15,-1965.71 h60 r270
  text "GND" at 98.43,-2073.98 h60 r90
  text "GND" at 7303.15,-2103.5 h60 r270
  text "6V" at 98.43,-2211.77 h60 r90
  text "12V" at 7303.15,-2398.78 h60 r270
  text "GND" at 98.43,-2447.99 h60 r90
  text "GND" at 7303.15,-2575.94 h60 r270
  text "12V" at 98.43,-2625.16 h60 r90
  text "+" at 5830.31,-4423.58 h60
  text "G" at 1090.08,-5657.99 h60 r90
  text "GND" at 1427.17,-8461.77 h60 r180
  text "12V" at 1604.33,-8461.77 h60 r180
  text "GND" at 2529.53,-8481.46 h60 r180
  text "6V" at 2706.69,-8481.46 h60 r180
  text "GND" at -639.76,-8501.14 h60 r180
  text "12V" at -442.91,-8501.14 h60 r180
  text "GND" at 167.32,-8501.14 h60 r180
  text "6V" at 305.12,-8501.14 h60 r180
  text "6V" at 1775.04,-8904.92 h60
  text "GND" at 2215.04,-8904.92 h60
  text "12V" at -780.39,-8944.29 h60
  text "GND" at -320.39,-8944.29 h60
Bottom Solder:
  circle w10: c-700.39,-9184.29 r201.25
  circle w10: c-250.39,-9184.29 r201.25
  circle w10: c1835.04,-9144.92 r201.25
  circle w10: c2285.04,-9154.92 r201.25
  region: -901.64,-9184.29 ccw(c-700.39,-9184.29) -700.39,-9385.54 ccw(c-700.39,-9184.29) -499.15,-9184.29 ccw(c-700.39,-9184.29) -700.39,-8983.05 ccw(c-700.39,-9184.29)
  region: -451.64,-9184.29 ccw(c-250.39,-9184.29) -250.39,-9385.54 ccw(c-250.39,-9184.29) -49.15,-9184.29 ccw(c-250.39,-9184.29) -250.39,-8983.05 ccw(c-250.39,-9184.29)
  region: 1633.79,-9144.92 ccw(c1835.04,-9144.92) 1835.04,-9346.17 ccw(c1835.04,-9144.92) 2036.29,-9144.92 ccw(c1835.04,-9144.92) 1835.04,-8943.68 ccw(c1835.04,-9144.92)
  region: 2083.79,-9154.92 ccw(c2285.04,-9154.92) 2285.04,-9356.17 ccw(c2285.04,-9154.92) 2486.29,-9154.92 ccw(c2285.04,-9154.92) 2285.04,-8953.68 ccw(c2285.04,-9154.92)

## Text inside footprints (layer, text, board x,y; h text height)
Micro_SD: Top Overlay "GND" at 7432.52,-8489.65 h60; Top Overlay "VCC" at 7432.52,-8389.65 h60; Top Overlay "MISO" at 7432.52,-8289.65 h60; Top Overlay "MOSI" at 7432.52,-8189.65 h60; Top Overlay "SCK" at 7432.52,-8084.65 h60; Top Overlay "CS" at 7427.52,-7984.65 h60
?: Top Overlay "12V-5V / FOR Raspberry Pi" at 5273.11,-2128.23 h60